# Altium PCB PCB2 (Failed design).PcbDoc
Units mm, origin at the board's own origin, x right, y up, seen from the top; angles counter-clockwise.
Board outline 40 x 40 mm, 2 copper layers (Top Layer, Bottom Layer); 9 components, 6 nets, 22 pads, 67 vias.
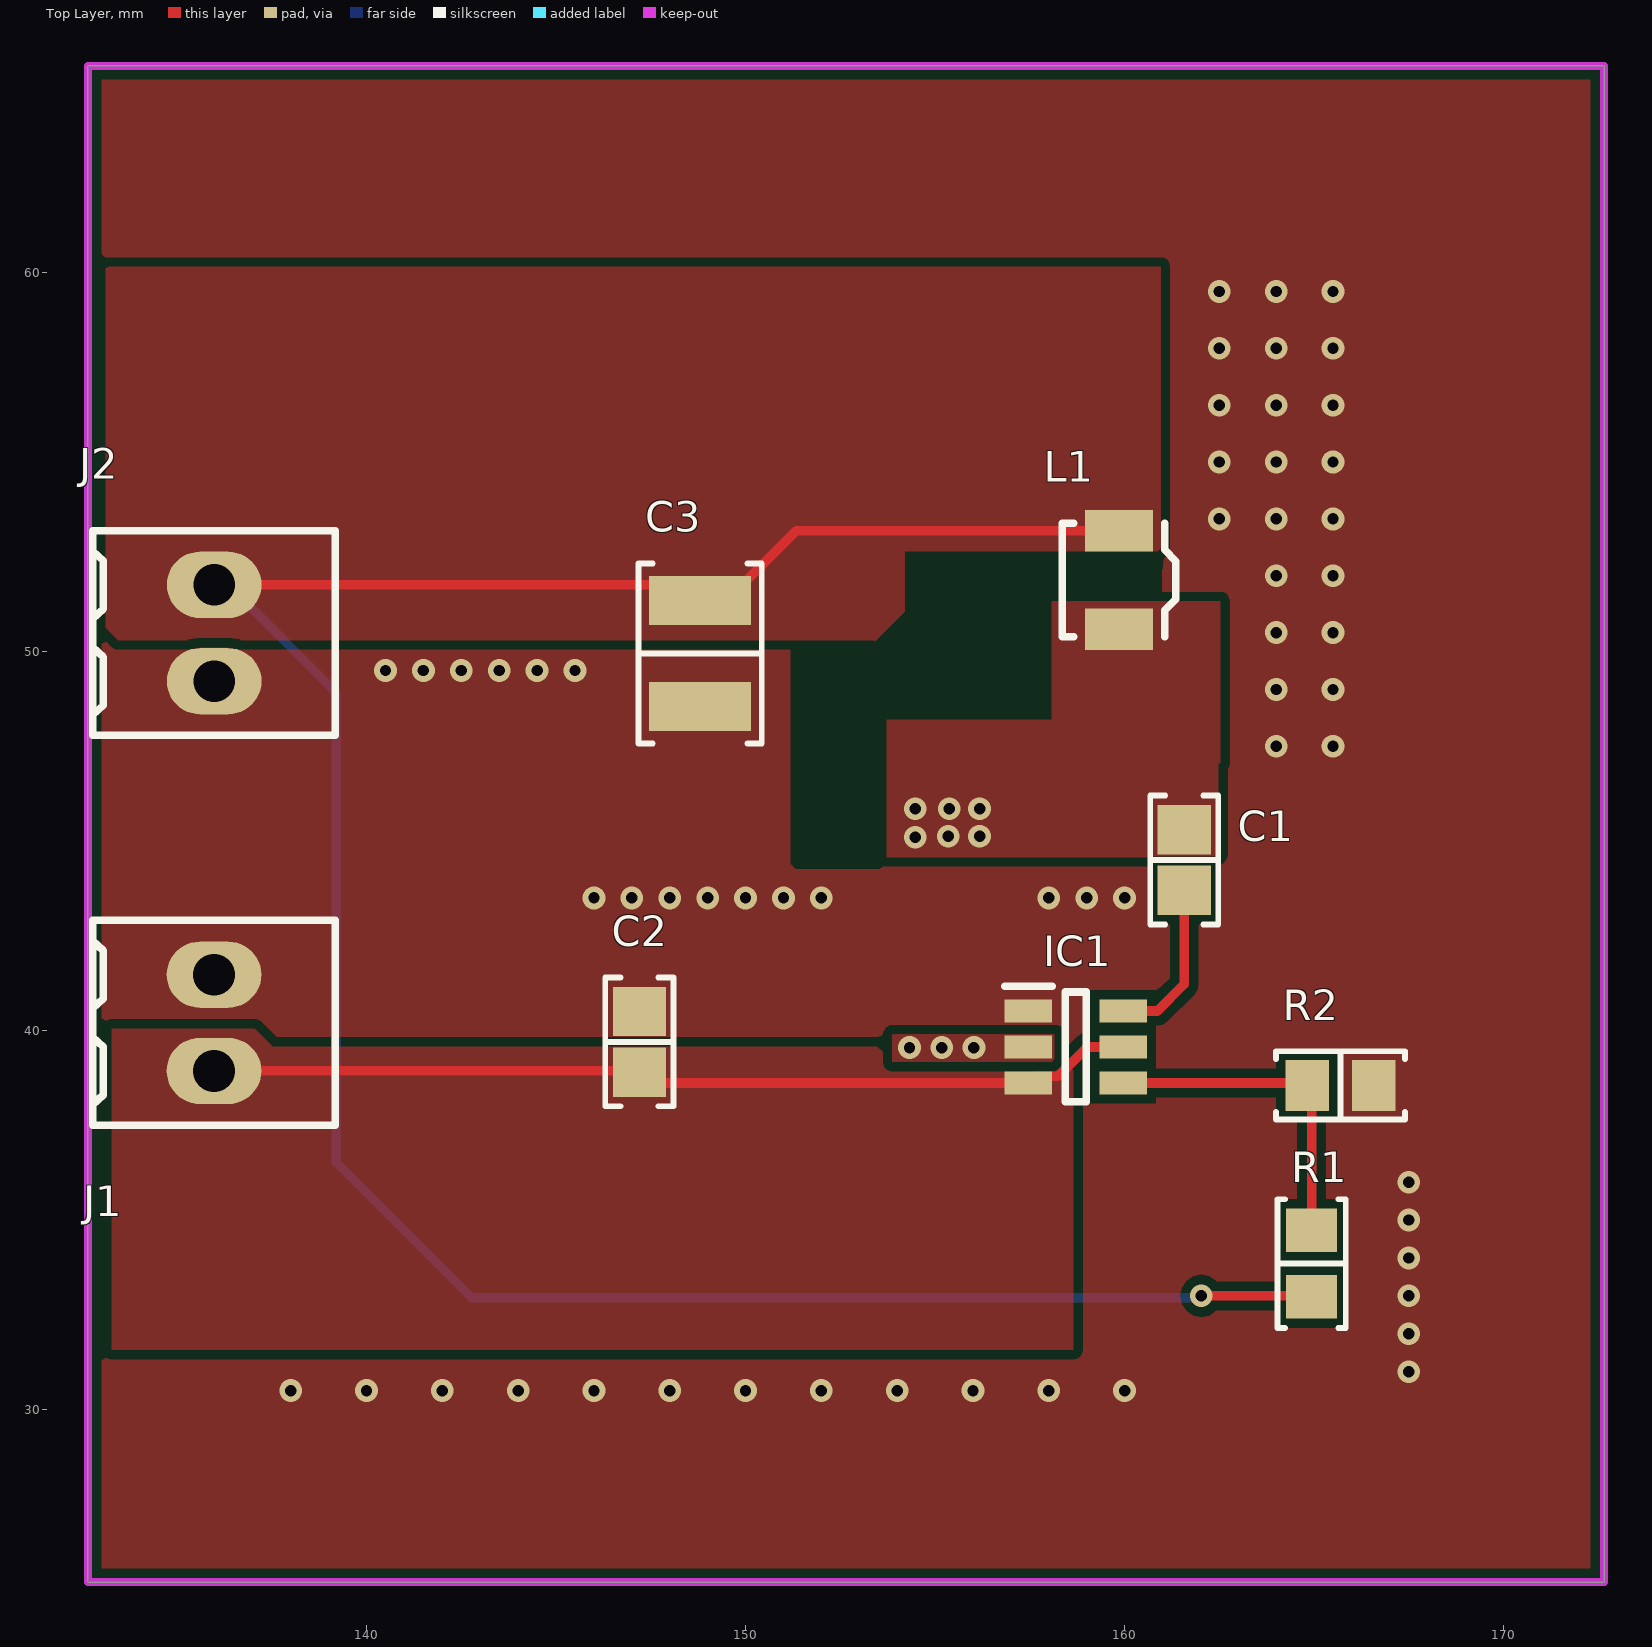
[diagram p0: Top Layer view]
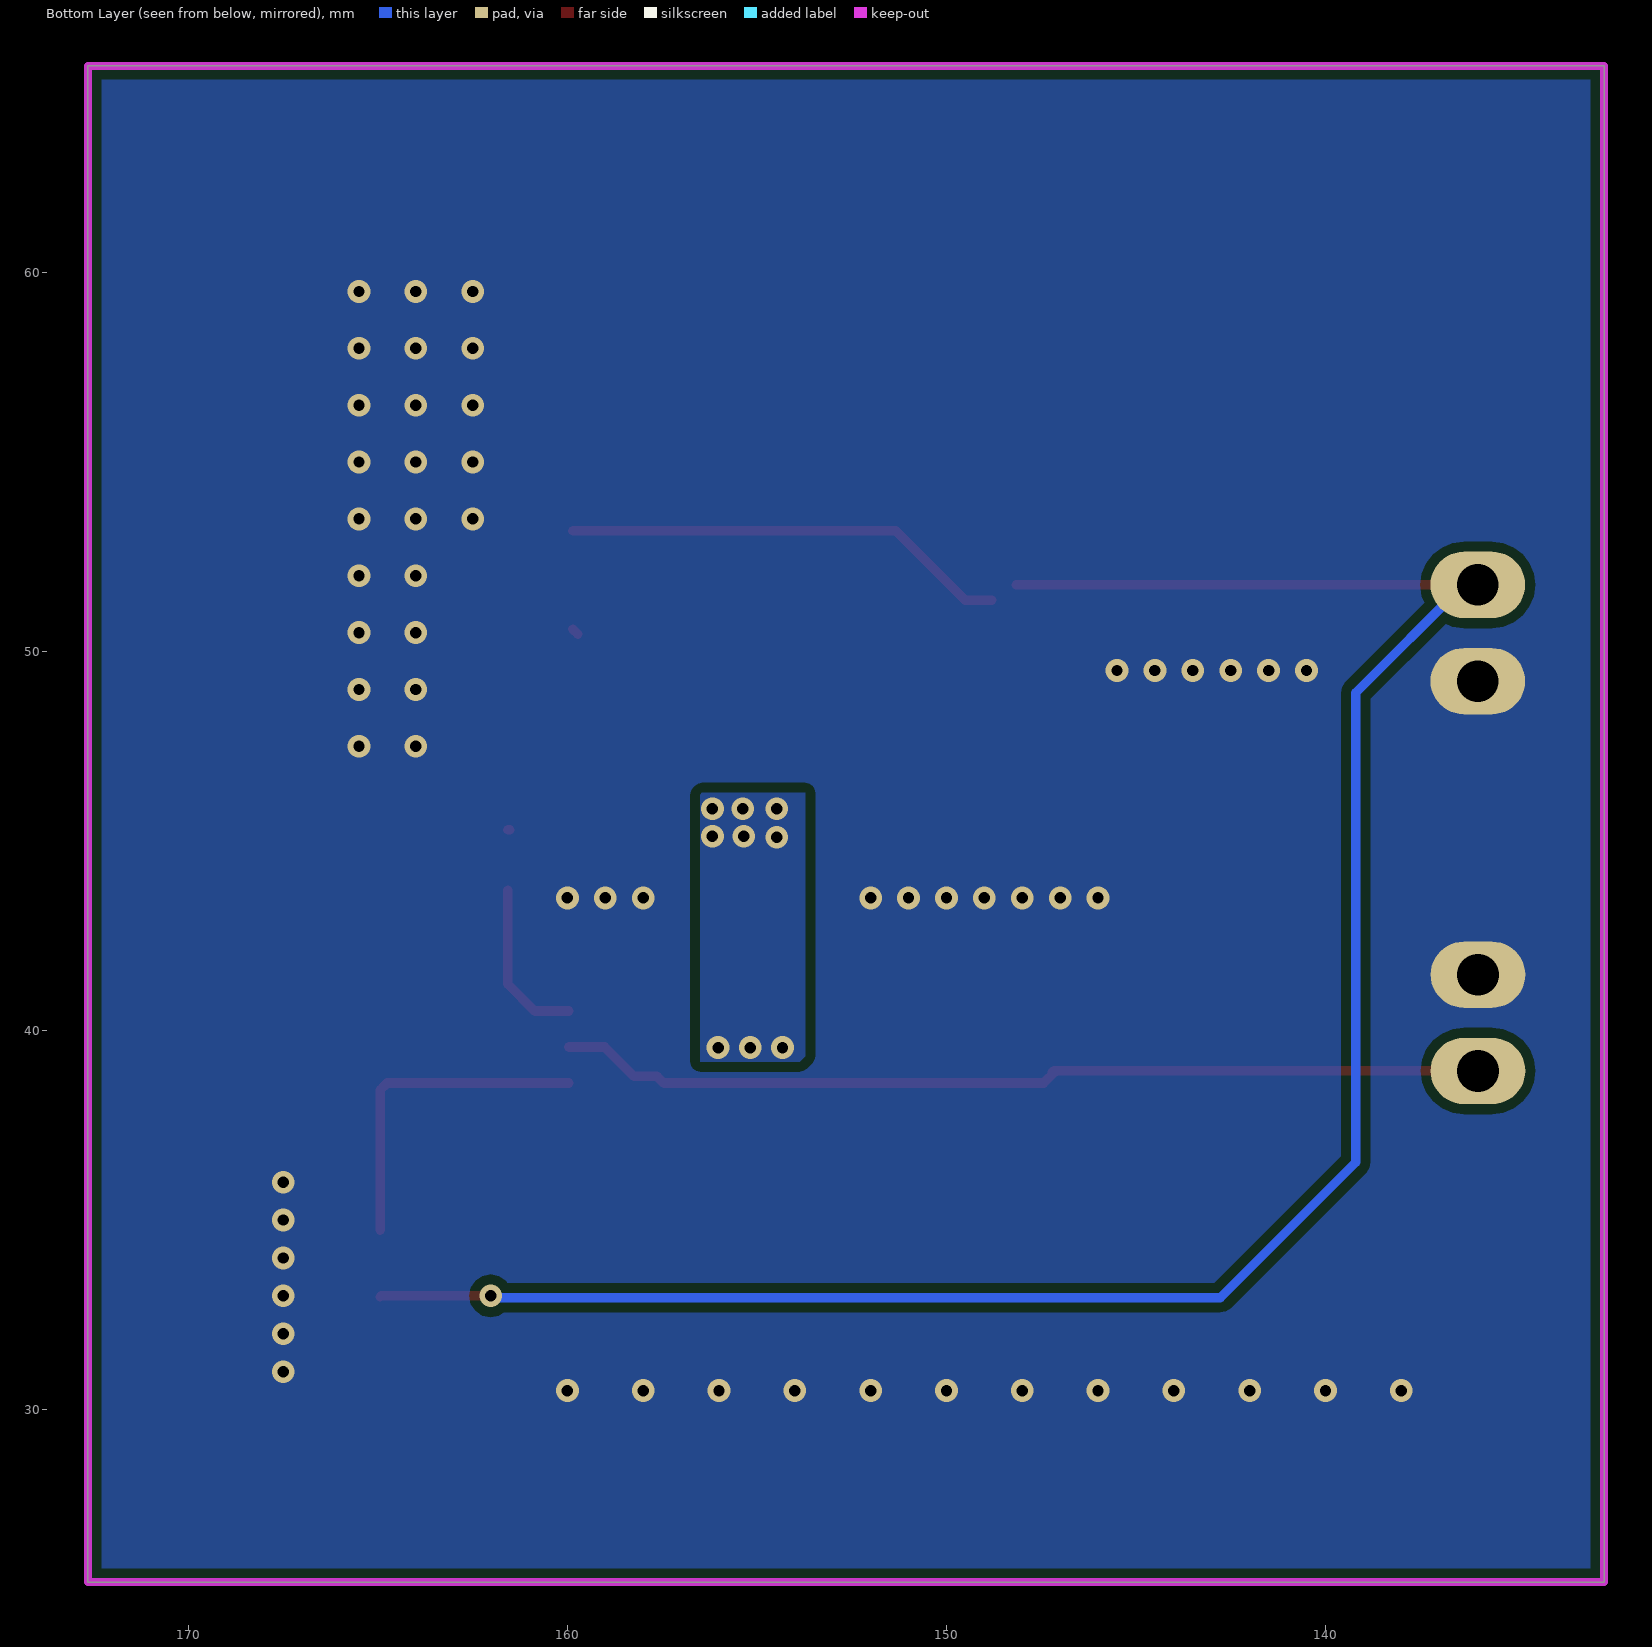
[diagram p1: Bottom Layer view, seen from below]
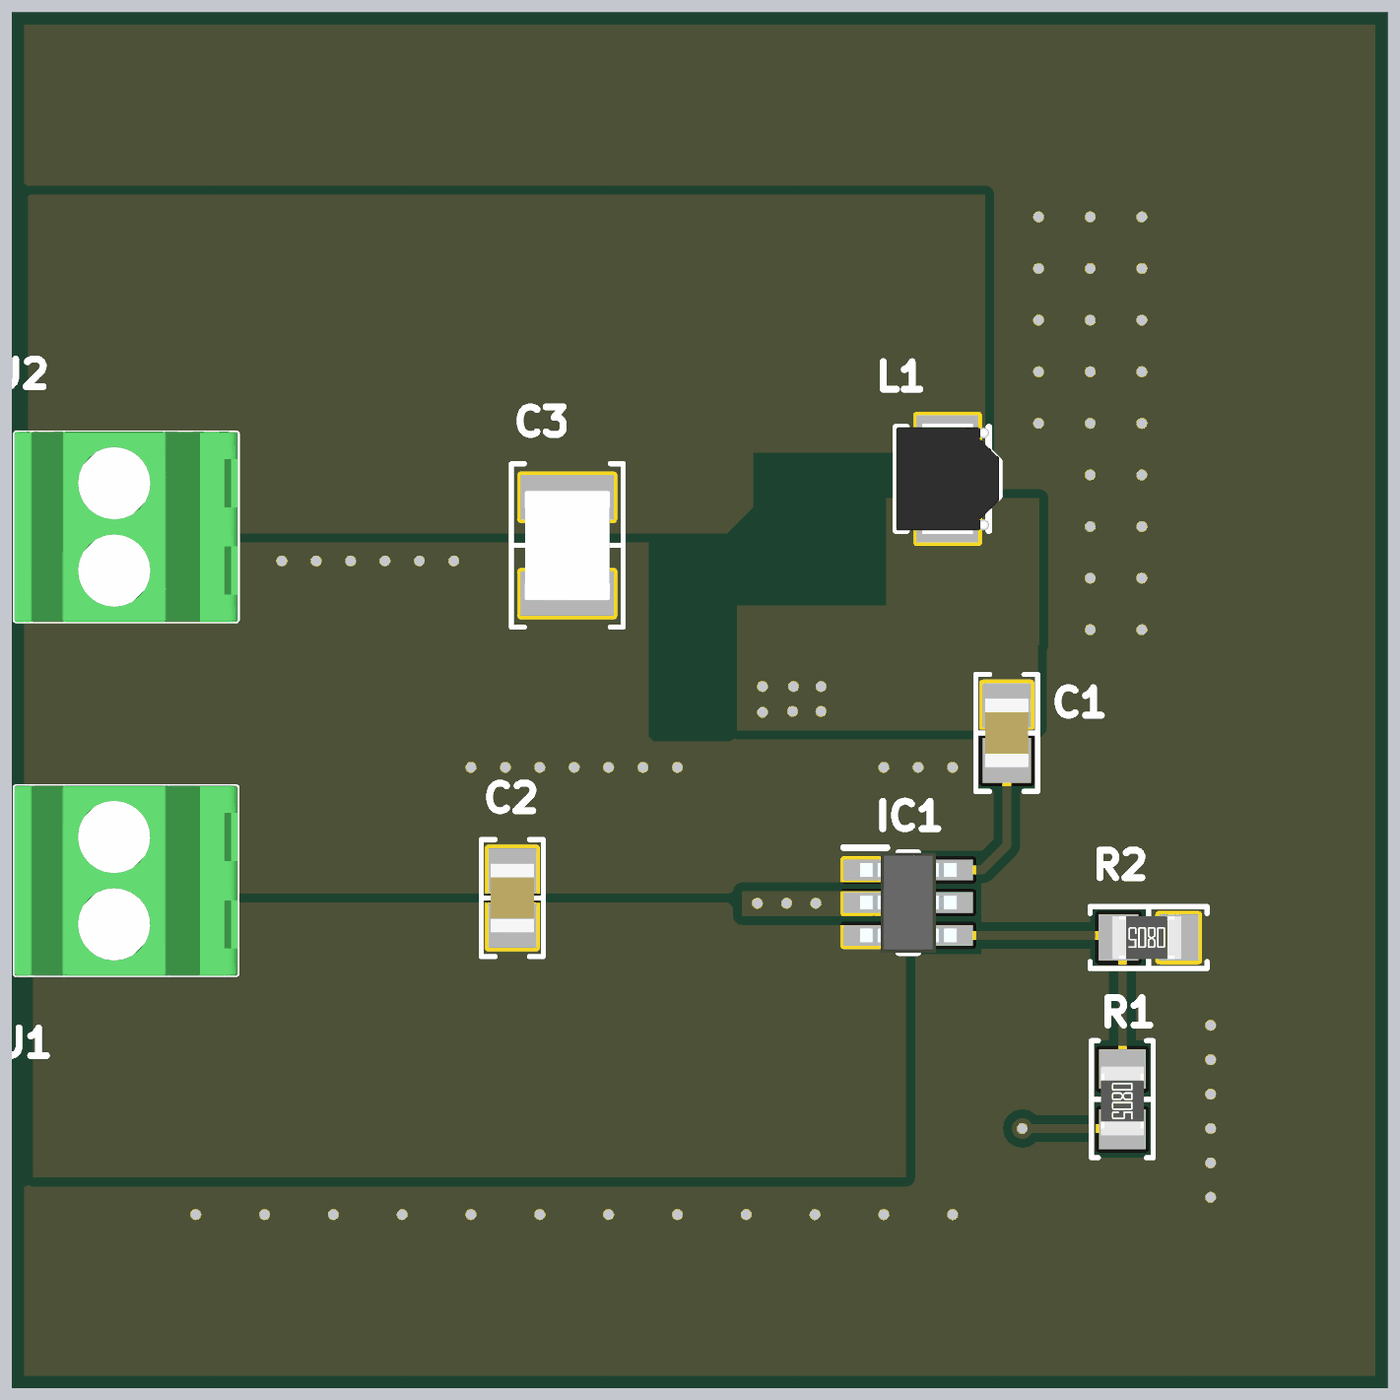
[diagram p2: 3D render of the assembled board from above, using the file's embedded part models]

## Layer stack, top to bottom
Top Solder: solder mask 0.0102, Solder Resist, Dk 3.5
Top Layer: signal copper 0.0356
Dielectric 1: dielectric 0.32, FR-4, Dk 4.8
Bottom Layer: signal copper 0.0356
Bottom Solder: solder mask 0.0102, Solder Resist, Dk 3.5

## Board outline
132.65,25.45 132.65,65.45 172.65,65.45 172.65,25.45

## Design rules (kind name [scope] priority, off if disabled: settings)
BoardOutlineClearance [All] p1: gap=0.3 ignorepadtopadclearanceinfootprint=FALSE except(0: Arc-CutoutEdge Arc-SplitContinuation Track-CutoutEdge Track-SplitContinuation SMDPad-CutoutEdge SMDPad-SplitContinuation THPad-CutoutEdge THPad-SplitContinuation Via-CutoutEdge Via-SplitContinuation Fill-CutoutEdge Fill-SplitContinuation Poly-CutoutEdge Poly-SplitContinuation Region-CutoutEdge Region-SplitContinuation Text-CutoutEdge Text-SplitContinuation)
Clearance [All] p1: gap=0.254 ignorepadtopadclearanceinfootprint=FALSE except(0: Arc-Hole Track-Hole SMDPad-Hole THPad-Hole Via-Hole Fill-Hole Poly-Hole Region-Hole Text-Hole)
PolygonConnect [All] p1: connectstyle=Direct reliefconductorwidth=0.254 reliefentries=4 polygonreliefangle="90 Angle" airgapwidth=0.254
RoutingVias [All] p1: holewidth=0.3 width=0.6 viastyle="Through Hole" minholewidth=0.3 minwidth=0.6 maxholewidth=0.3 maxwidth=0.6
SolderMaskExpansion [All] p1: expansion=0.102 istentingtop=FALSE
Width [All] p1: maxlimit=0.254 minlimit=0.254 preferedwidth=0.254
30 further rules are at their usual default settings.

## Components (designator, comment, footprint, x,y, rotation, side; value= is the part's Value field where it differs from the comment)
C1 "0.1µF" "CAP 0805_2012" 161.575,44.5 r90 top
C2 "22µF" "CAP 0805_2012" 147.2,39.7 r270 top
C3 "47µF" "CAP 1210_3225 - 2.8MM" 148.8,49.95 r90 top
IC1 "TPS561208DDCR" SOT95P280X110-6N 158.712,39.567 r0 top
J1 "=PartNumber" "TE 282834-2" 135.975,40.205 r90 top
J2 "=PartNumber" "TE 282834-2" 135.979,50.489 r90 top
L1 "4.7µH" "TDK SPM3012-LR" 159.855,51.886 r90 top
R1 "56.2 kOhms" "RES 0805_2012" 164.935,33.852 r270 top
R2 "10 kOhms" "RES 0805_2012" 165.697,38.551 r180 top

## Footprints (in the part's own frame and the unit in brackets; to place one, negate y for a bottom-side part, rotate by r counter-clockwise, add the part's x,y. Pads: shape width x height; smd on the part's side, far side on the other; paste and mask are expansions set on the pad)
"CAP 0805_2012" [mm] "Chip Capacitor, 2-Leads, Body 2.00x1.20mm, IPC Medium Density"
  rect 1.3x1.4 smd: 1(-0.8,0) 2(0.8,0)
  silkscreen extent -1.7,-0.9 1.7,0.9, body extent -1,-0.64 1,0.64, height 1.26
"CAP 1210_3225 - 2.8MM" [mm] "Chip Capacitor, 2-Leads, Body 3.20x2.50mm, IPC Medium Density"
  rect 1.3x2.7 smd: 1(-1.4,0) 2(1.4,0)
  silkscreen extent -2.37,-1.63 2.37,1.63, body extent -1.6,-1.25 1.6,1.25, height 2.8
"RES 0805_2012" [mm] "Chip Resistor, 2-Leads, Body 2.00x1.25mm, IPC Medium Density"
  rect 1.15x1.35 smd: 1(-0.875,0) 2(0.875,0)
  silkscreen extent -1.7,-0.9 1.7,0.9, body extent -0.95,-0.62 1.05,0.63, height 0.6
SOT95P280X110-6N [mm]
  rect 1.25x0.6 smd: 1(-1.25,0.95) 2(-1.25,0) 3(-1.25,-0.95) 4(1.25,-0.95) 5(1.25,0) 6(1.25,0.95)
  silkscreen extent -1.88,-1.45 0.28,1.6, body extent -1.4,-1.45 1.4,1.45, height 1.1
"TDK SPM3012-LR" [mm] "Inductor, 2-Leads, Body 3.00x3.00mm, IPC Medium Density"
  rect 1.1x1.8 smd: 1(-1.3,0) 2(1.3,0)
  silkscreen extent -1.5,-1.5 1.5,1.5, body extent -1.6,-1.5 1.6,1.5, height 1.2
"TE 282834-2" [mm]
  oval 1.75x2.5 hole 1.1: 1(-1.27,0) 2(1.27,0)
  silkscreen extent -2.7,-3.2 2.7,3.2, body extent -2.77,-3.25 2.77,3.25, height 10

## Part data
C1: library part CC0805MRX7R9BB104, "CAP CER 0.1UF 50V X7R 0805", Device Package="0805 (2012 Metric)", Manufacturer=Yageo, Operating Temperature="-55°C ~ 125°C", Supplier Part Number 1=311-4351-1-ND, Temperature Coefficient=X7R, Tolerance=±20%, Voltage - Rated=50V, Applications="General Purpose", Capacitance=0.1µF, ComponentLink1Description=Datasheet, ComponentLink1URL=https://www.yageo.com/upload/media/product/productsearch/datasheet/mlcc/UPY-GPHC_X7R_6.3V-to-50V_18.pdf, ComponentLink2Description="DigiKey Link", ComponentLink2URL=http://digikey.com/product-detail/en/yageo/CC0805MRX7R9BB104/311-4351-1-ND/8025440, LastUpdated="1/21/2020 12:03:06 AM", Lifecycle Status=Active, Minimum Order=1, Mounting Type="Surface Mount, MLCC", Package / Case="0805 (2012 Metric)", Packaging=TapeAndReel, Part Number=CC0805MRX7R9BB104, Part Status=Active, PartId=2475, Price=0.02, Series=CC, Size / Dimension="0.079\" L x 0.049\" W (2.00mm x 1.25mm)", Supplier 1=DigiKey, Thickness (Max)="0.037\" (0.95mm)"
C2: library part CL21A226KOQNNNG, "CAP CER 22UF 16V X5R 0805", Device Package="0805 (2012 Metric)", Manufacturer="Samsung Electro-Mechanics", Operating Temperature="-55°C ~ 85°C", Supplier Part Number 1=1276-7092-1-ND, Temperature Coefficient=X5R, Tolerance=±10%, Voltage - Rated=16V, Applications="General Purpose", Capacitance=22µF, ComponentLink1Description=Datasheet, ComponentLink1URL=//media.digikey.com/pdf/Data%20Sheets/Samsung%20PDFs/CL21A226KOQNNNG_Spec.pdf, ComponentLink2Description="DigiKey Link", ComponentLink2URL=http://digikey.com/product-detail/en/samsung-electro-mechanics/CL21A226KOQNNNG/1276-7092-1-ND/8021509, LastUpdated="1/21/2020 12:03:05 AM", Lifecycle Status=Active, Minimum Order=1, Mounting Type="Surface Mount, MLCC", Package / Case="0805 (2012 Metric)", Packaging=TapeAndReel, Part Number=CL21A226KOQNNNG, Part Status=Active, PartId=3000, Price=0.09, Series=CL, Size / Dimension="0.079\" L x 0.049\" W (2.00mm x 1.25mm)", Supplier 1=DigiKey, Thickness (Max)="0.055\" (1.40mm)"
C3: library part GRM32EC81C476KE15L, "CAP CER 47UF 16V X6S 1210", Device Package="1210 (3225 Metric)", Manufacturer="Murata Electronics", Operating Temperature="-55°C ~ 105°C", Supplier Part Number 1=490-10531-1-ND, Temperature Coefficient=X6S, Tolerance=±10%, Voltage - Rated=16V, Applications="General Purpose", Capacitance=47µF, ComponentLink1Description=Datasheet, ComponentLink1URL=https://search.murata.co.jp/Ceramy/image/img/A01X/G101/ENG/GRM32EC81C476KE15-01.pdf, ComponentLink2Description="DigiKey Link", ComponentLink2URL=http://digikey.com/product-detail/en/murata-electronics/GRM32EC81C476KE15L/490-10531-1-ND/5026469, LastUpdated="1/21/2020 12:30:50 AM", Lifecycle Status=Active, Minimum Order=1, Mounting Type="Surface Mount, MLCC", Package / Case="1210 (3225 Metric)", Packaging=TapeAndReel, Part Number=GRM32EC81C476KE15L, Part Status=Active, PartId=23627, Price=0.23, Series=GRM, Size / Dimension="0.126\" L x 0.098\" W (3.20mm x 2.50mm)", Supplier 1=DigiKey, Thickness (Max)="0.106\" (2.70mm)"
IC1: "Buck Switching Regulator IC Positive Adjustable 0.76V 1 Output 1A SOT-23-6 Thin, TSOT-23-6"
J1 J2: library part 282834-2, "TERM BLK 2P SIDE ENT 2.54MM PCB", Color=Green, Current=10A, Manufacturer="TE Connectivity AMP Connectors", Supplier Part Number 1=A98333-ND, Voltage=150V, ComponentLink1Description=Datasheet, ComponentLink1URL=https://www.te.com/commerce/DocumentDelivery/DDEController?Action=srchrtrv&DocNm=282834&DocType=Customer+Drawing&DocLang=English, ComponentLink2Description="DigiKey Link", ComponentLink2URL=http://digikey.com/product-detail/en/te-connectivity-amp-connectors/282834-2/A98333-ND/1150135, LastUpdated="1/15/2020 4:15:38 AM", Lifecycle Status=Active, Mating Orientation="Horizontal with Board", Minimum Order=1, Mounting Type="Through Hole", Number of Levels=1, Packaging=Bulk, Part Number=282834-2, Part Status=Active, Pitch="0.100\" (2.54mm)", Positions Per Level=2, Price=0.88, Series=Buchanan, Supplier 1=DigiKey, Wire Gauge="16-30 AWG", Wire Termination="Screw - Rising Cage Clamp"
L1: library part SPM3015T-4R7M-LR, "FIXED IND 4.7UH 1.8A 199.1 MOHM", Current - Saturation=3A, Current Rating (Amps)=1.8A, DC Resistance (DCR)="199.1mOhm Max", Device Package=Nonstandard, Inductance Frequency - Test=100kHz, Manufacturer="TDK Corporation", Operating Temperature="-40°C ~ 125°C", Supplier Part Number 1=445-174451-1-ND, Tolerance=±20%, ComponentLink1Description=Datasheet, ComponentLink1URL=https://product.tdk.com/info/en/catalog/datasheets/inductor_commercial_power_spm3015-lr_en.pdf?ref_disty=digikey, ComponentLink2Description="DigiKey Link", ComponentLink2URL=http://digikey.com/product-detail/en/tdk-corporation/SPM3015T-4R7M-LR/445-174451-1-ND/5962377, Height - Seated (Max)="0.047\" (1.20mm)", Inductance=4.7µH, LastUpdated="1/21/2020 3:26:10 AM", Lifecycle Status=Active, Material - Core=Metal, Minimum Order=1, Mounting Type="Surface Mount", Package / Case=Nonstandard, Packaging=TapeAndReel, Part Number=SPM3015T-4R7M-LR, Part Status=Active, PartId=139, Price=0.59, Series=SPM-LR, Shielding=Shielded, Size / Dimension="0.126\" L x 0.118\" W (3.20mm x 3.00mm)", Supplier 1=DigiKey, Type=Wirewound
R1: library part 7-2176093-1, "RES SMD 56.2K OHM 0.1% 1/4W 0805", Device Package="0805 (2012 Metric)", Manufacturer="TE Connectivity Passive Product", Operating Temperature="-55°C ~ 155°C", Power (Watts)="0.25W, 1/4W", Supplier Device Package=0805, Supplier Part Number 1=A110711CT-ND, Temperature Coefficient=±25ppm/°C, Tolerance=±0.1%, ComponentLink1Description=Datasheet, ComponentLink1URL=https://www.te.com/commerce/DocumentDelivery/DDEController?Action=srchrtrv&DocNm=1773272&DocType=DS&DocLang=English, ComponentLink2Description="DigiKey Link", ComponentLink2URL=http://digikey.com/product-detail/en/te-connectivity-passive-product/7-2176093-1/A110711CT-ND/4035066, Composition="Thin Film", Height - Seated (Max)="0.026\" (0.65mm)", LastUpdated="1/21/2020 1:40:37 AM", Lifecycle Status=Active, Minimum Order=1, Number of Terminations=2, Package / Case="0805 (2012 Metric)", Packaging=TapeAndReel, Part Number=7-2176093-1, Part Status=Active, PartId=47633, Price=0.15, Resistance="56.2 kOhms", Series="RP73P, Holsworthy", Size / Dimension="0.079\" L x 0.049\" W (2.00mm x 1.25mm)", Supplier 1=DigiKey
R2: library part AT0805FRE0710KL, "RES SMD 10K OHM 1% 1/8W 0805", Device Package="0805 (2012 Metric)", Manufacturer=Yageo, Operating Temperature="-55°C ~ 155°C", Power (Watts)="0.125W, 1/8W", Ratings=AEC-Q200, Supplier Device Package=0805, Supplier Part Number 1=YAG2132CT-ND, Temperature Coefficient=±50ppm/°C, Tolerance=±1%, ComponentLink1Description=Datasheet, ComponentLink1URL=http://www.yageo.com/documents/recent/PYu-AT_51_RoHS_L_5.pdf, ComponentLink2Description="DigiKey Link", ComponentLink2URL=http://digikey.com/product-detail/en/yageo/AT0805FRE0710KL/YAG2132CT-ND/5139580, Composition="Thin Film", Features="Anti-Sulfur, Automotive AEC-Q200, Moisture Resistant", Height - Seated (Max)="0.024\" (0.60mm)", LastUpdated="1/21/2020 1:49:26 AM", Lifecycle Status=Active, Minimum Order=1, Number of Terminations=2, Package / Case="0805 (2012 Metric)", Packaging=TapeAndReel, Part Number=AT0805FRE0710KL, Part Status=Active, PartId=29266, Price=0.10, Resistance="10 kOhms", Series=AT, Size / Dimension="0.079\" L x 0.049\" W (2.00mm x 1.25mm)", Supplier 1=DigiKey

## Via types
v1: diameter 0.6, hole 0.3, Top Layer to Bottom Layer, tented both sides, 67 vias

## Nets (pads, with @x,y where several pads share a name; then routed paths per layer and width w, separated by ;. In a path a pad name is that pad's centre, name@x,y a point inside that pad or via, vN(x,y) a via of type N, cw(c..) or ccw(c..) an arc to the next point about the centre after c; other vN are vias at no path point)
FB: IC1.4 R1.1 R2.2 | length 8.8
  Top Layer w0.254: IC1.4 164.756,38.617 R2.2 164.935,38.438 R1.1
GND: C2.1 C3.1 IC1.1 J1.2 J2.1 R2.1
  other v1: 138,30.5 140,30.5 142,30.5 144,30.5 146,30.5 148,30.5 150,30.5 152,30.5 154,30.5 156,30.5 158,30.5 160,30.5 167.5,31 167.5,32 167.5,33 167.5,34 167.5,35 167.5,36 146,43.5 147,43.5 148,43.5 149,43.5 150,43.5 151,43.5 152,43.5 158,43.5 159,43.5 160,43.5 164,47.5 165.5,47.5 164,49 165.5,49 140.5,49.5 141.5,49.5 142.5,49.5 143.5,49.5 144.5,49.5 145.5,49.5 164,50.5 165.5,50.5 164,52 165.5,52 162.5,53.5 164,53.5 165.5,53.5 162.5,55 164,55 165.5,55 162.5,56.5 164,56.5 165.5,56.5 162.5,58 164,58 165.5,58 162.5,59.5 164,59.5 165.5,59.5
IN: C2.2 IC1.3 IC1.5 J1.1 | length 24.6
  Top Layer w0.254: J1.1 147.165,38.935 C2.2 147.15,38.9 147.433,38.617 IC1.3 157.635,38.79 158.24,38.79 159.017,39.567 IC1.5
NetC1_1: C1.1 IC1.6 | length 4.4
  Top Layer w0.254: IC1.6 160.867,40.517 161.575,41.225 C1.1
OUT: C3.2 J2.2 L1.2 R1.2 | length 68
  Top Layer w0.254: J2.2 C3.2@148.15,51.759 ; C3.2 149.5,51.35 151.336,53.186 L1.2 ; v1(162.025,33) 164.912,33 R1.2
  Bottom Layer w0.254: J2.2 136.354,51.759 139.2,48.913 139.2,36.525 142.775,32.95 161.975,32.95 v1(162.025,33)
SW: C1.2 IC1.2 L1.1 | length 0.2
  Top Layer w0.254: L1.1@159.725,50.456 L1.1 ; C1.2@161.525,45.3 C1.2
  other v1: 154.325,39.55 155.175,39.55 156.025,39.55 154.475,45.1 155.35,45.125 156.175,45.125 154.475,45.85 155.375,45.85 156.175,45.85

## Polygon pours and split planes (outlines as drawn)
GND on Top Layer "GND_L01_P010" (solid, pour order 10): 132.65,65.45 132.65,64.4 132.65,25.45 172.65,25.45 172.65,29.075 172.65,65.45
SW on Top Layer "SW_L01_P003" (solid, remove dead copper, pour order 3): 162.5,44.575 153.725,44.575 153.725,48.2 162.475,48.2 162.475,44.65 162.425,44.6
no net on Top Layer (solid, pour order 9): 131.1,66.5
OUT on Top Layer "OUT_L01_P008" (solid, pour order 8): 133.125,50.625 133.45,50.3 153.4,50.3 153.425,50.275 154.2,51.05 154.2,52.65 160.875,52.65 160.95,52.725 160.95,60.15 133.2,60.15 133.125,60.225
IN on Top Layer "IN_L01_P007" (solid, pour order 7): 133.275,31.575 158.65,31.575 158.65,38.95 158.625,38.975 158.628,39.178 153.879,39.178 153.475,39.575 137.525,39.575 137.05,40.05 133.275,40.05
SW on Top Layer "SW_L01_P006" (solid, pour order 6): 158.075,51.35 158.1,51.325 162.525,51.325 162.525,47.05 158.075,47.05
no net on Top Layer "Top Layer-No Net" (solid, pour order 2): 154.95,40.55
SW on Top Layer "SW_L01_P001" (solid, pour order 1): 153.85,39.9 158.15,39.9 158.15,39.2 158.125,39.175 153.875,39.175 153.875,39.875
GND on Bottom Layer "GND_L02_P011" (solid, pour order 11): 132.65,65.45 132.65,64.4 132.65,25.45 172.65,25.45 172.65,29.075 172.65,65.45
SW on Bottom Layer "SW_L02_P005" (solid, pour order 5): 156.5,39.175 153.875,39.175 153.725,39.325 153.725,46.275 156.45,46.275 156.5,46.225
no net on Bottom Layer (solid, pour order 4): 153.725,46.275

## Keep-outs
Keep-Out Layer:
  the board outline again, w0.2

## Other copper
Top Layer:
  pour cut-out: 161,52.375 161,51.575 158.125,51.575 157.825,51.275 157.85,51.25 157.85,48.4 153.625,48.4 153.525,48.3 153.525,44.25 151.325,44.25 151.175,44.4 151.175,50.125 153.375,50.125 154.375,51.125 154.325,51.175 154.325,52.55 160.95,52.55 160.975,52.575 161.025,52.525 161.025,52.175